# Altium PCB PCB4.PcbDoc (part 6 of 7)
Units mm, origin at the board's own origin, x right, y up, seen from the top; angles counter-clockwise.
Board outline 234.9 x 198.3 mm, 4 copper layers (Top Layer, Signal Layer 2, Mid, Bottom Layer), stack 3.052 mm thick; 410 components, 320 nets, 2032 pads, 297 vias.
Unrouted connection lines stored in the file: 1.
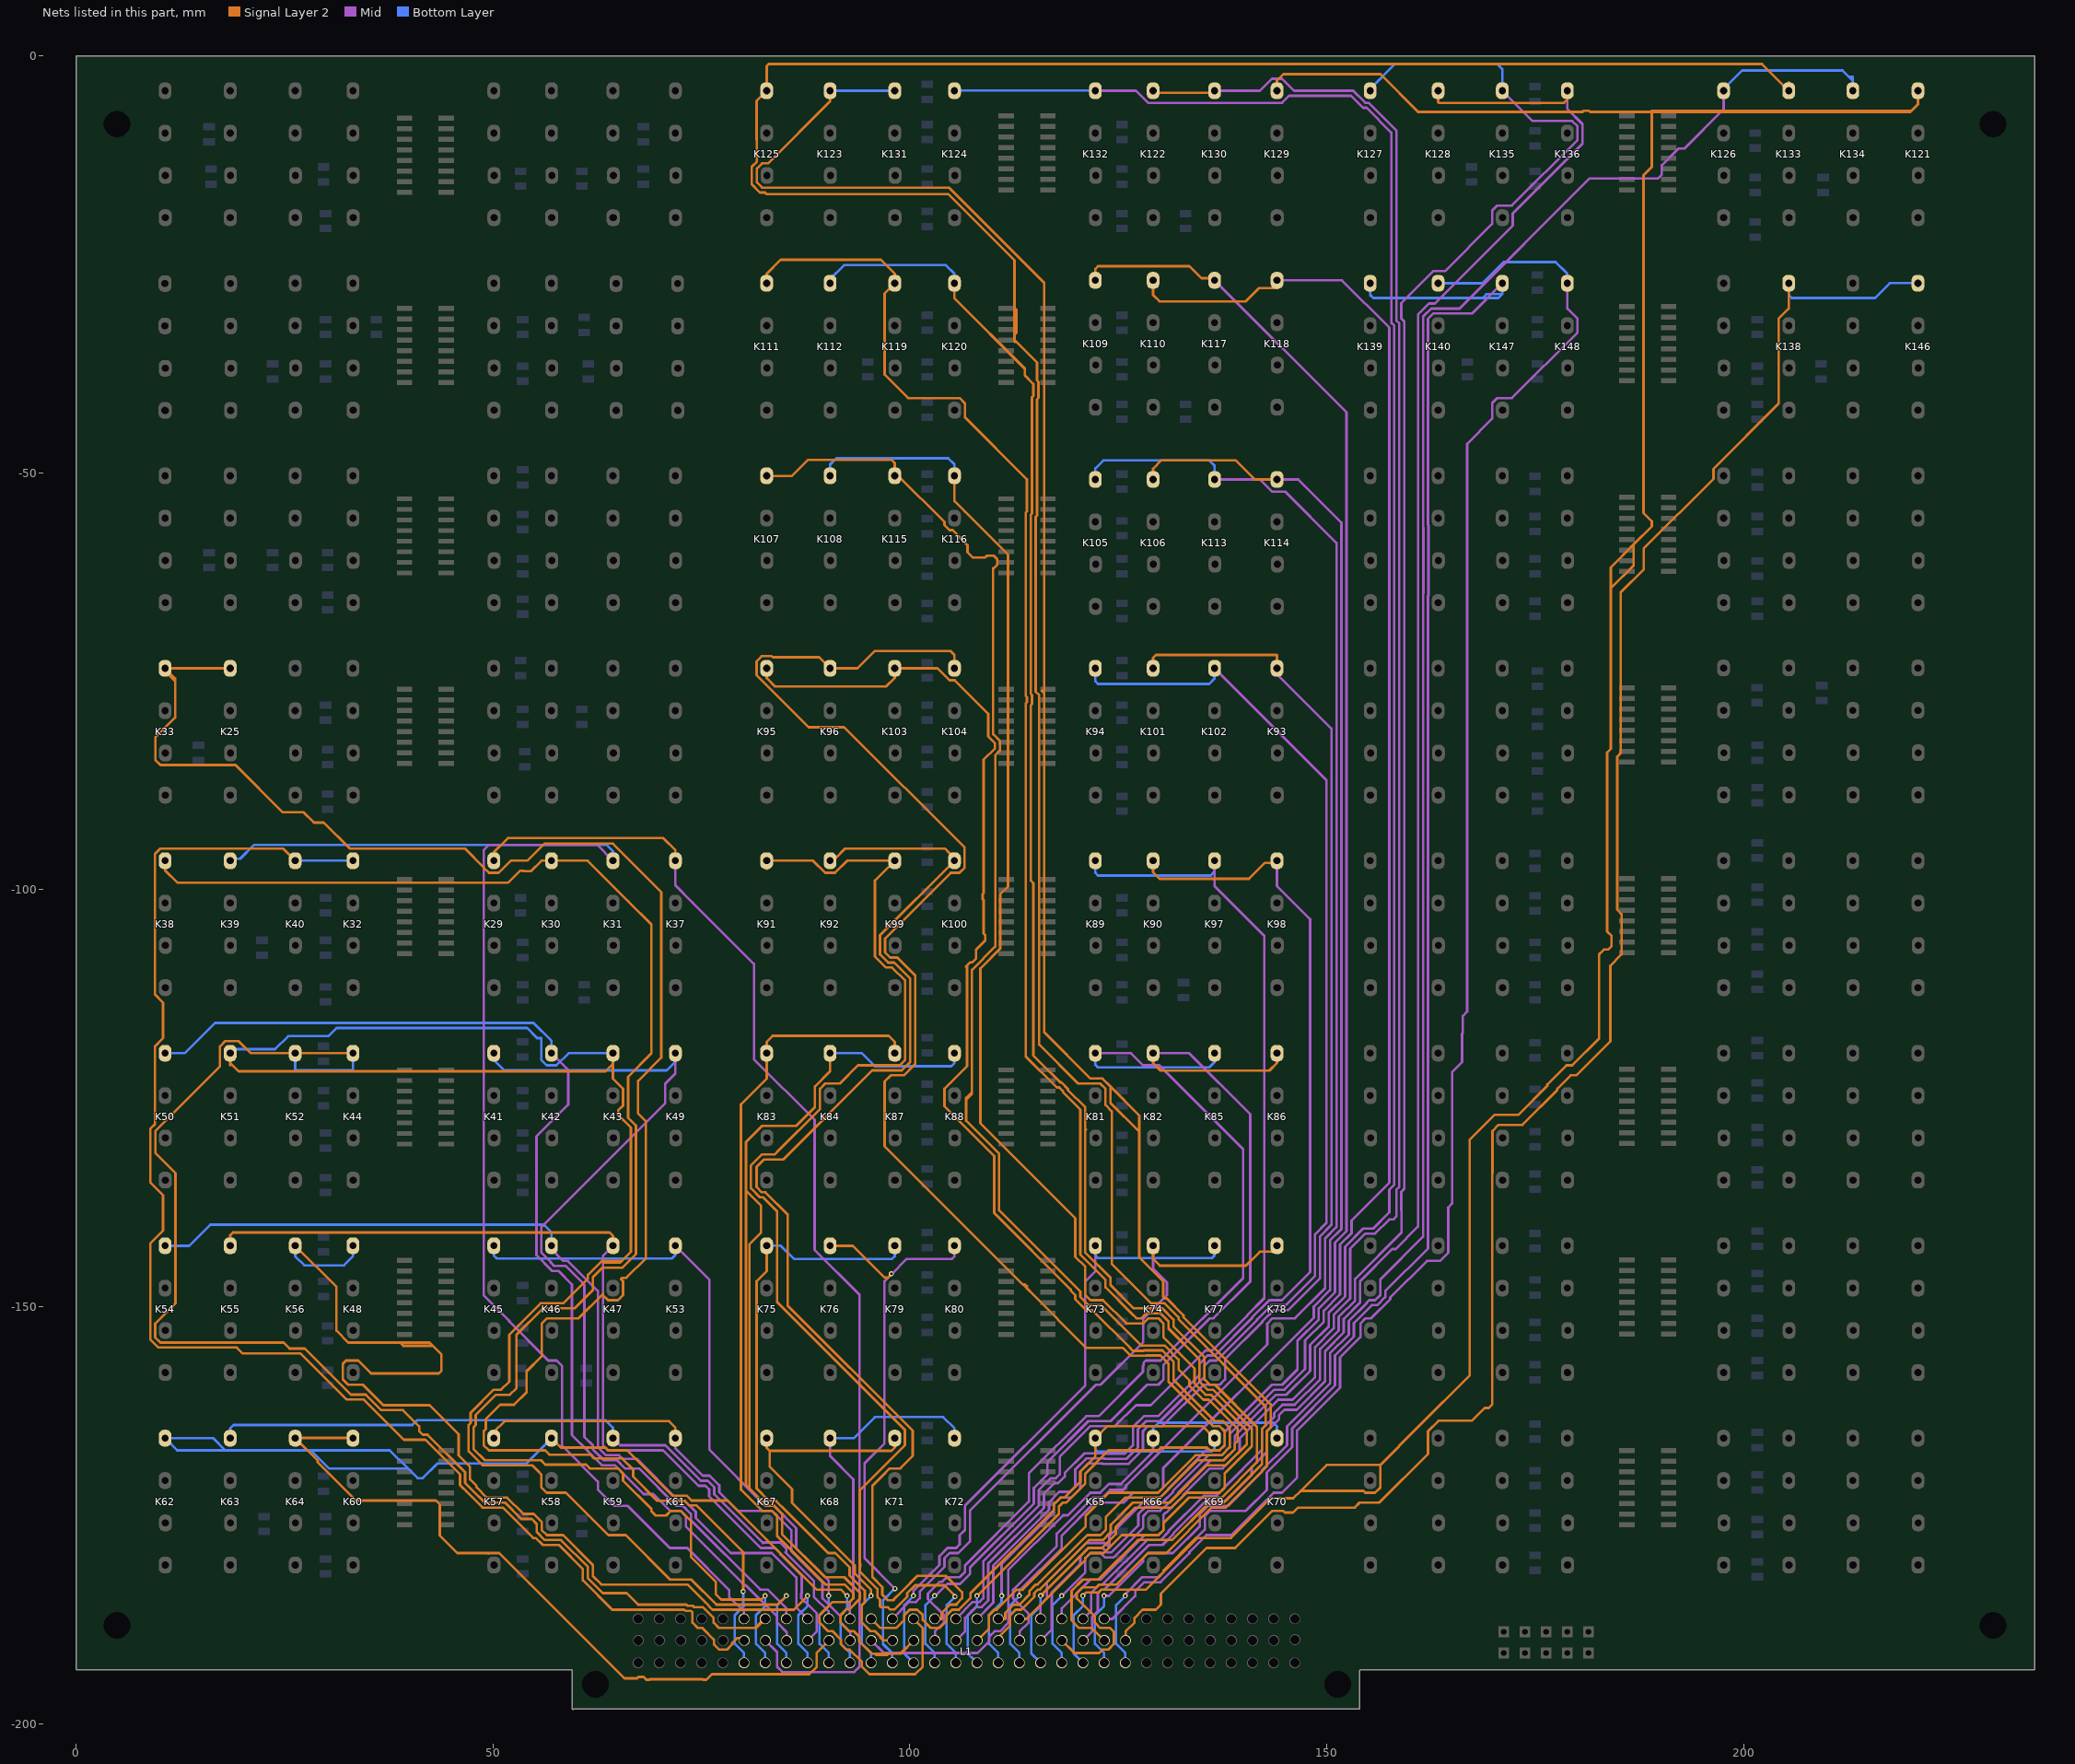
[diagram p8: the nets of this part, all layers, seen from the top]

## Via types
v1: diameter 0.6, hole 0.3, Top Layer to Bottom Layer, 292 vias
v2: diameter 0.7, hole 0.3, Top Layer to Bottom Layer, 5 vias

## Nets (pads, with @x,y where several pads share a name; then routed paths per layer and width w, separated by ;. In a path a pad name is that pad's centre, name@x,y a point inside that pad or via, vN(x,y) a via of type N, cw(c..) or ccw(c..) an arc to the next point about the centre after c; other vN are vias at no path point) (continued)
Y30: K25.7 K33.7 L1.16 | length 233.5
  Signal Layer 2 w0.3: K25.7@18.491,-73.432 18.491,-73.439 K33.7@10.689,-73.439 ; v1(80.008,-184.132) 80.008,-179.6 ; K33.7@10.681,-73.432 10.669,-73.444 10.669,-73.764 11.893,-74.988 ; K33.7@10.681,-73.432 10.681,-73.439 K33.7@10.689,-73.439 ; K33.7@10.681,-73.432 K33.7@10.689,-73.439 ; K33.7@10.689,-73.439 11.893,-74.644 11.893,-74.988 ; 11.893,-74.988 11.893,-79.341 9.509,-81.725 9.509,-84.421 10.13,-85.042 17.94,-85.042 19.133,-85.042 24.793,-90.702 27.303,-90.702 28.532,-91.93 29.716,-91.93 ; 29.716,-91.93 32.844,-95.059 ; 29.716,-91.93 32.844,-95.059 ; 32.844,-95.059 46.647,-95.059 ; 46.647,-95.059 48.887,-97.3 ; 46.647,-95.059 48.887,-97.3 ; 48.887,-97.3 48.887,-97.339 49.508,-97.959 50.69,-97.959 52.147,-96.502 54.138,-96.502 56.181,-94.459 64.386,-94.459 70.194,-100.267 70.194,-120.119 67.407,-122.906 67.407,-126.822 68.34,-127.755 68.34,-144.155 65.98,-146.515 65.497,-146.515 65.351,-146.66 65.607,-146.915 65.607,-148.574 64.986,-149.195 63.803,-149.195 63.183,-148.574 63.183,-148.464 60.271,-151.375 56.469,-151.375 55.849,-151.995 55.849,-155.914 54.03,-157.733 54.03,-160.235 52.529,-161.735 50.849,-161.735 49.134,-163.45 49.134,-164.667 48.887,-164.913 48.887,-166.572 49.508,-167.192 56.25,-167.192 56.772,-167.714 61.661,-167.714 62.119,-168.173 65.483,-168.173 66.807,-169.496 66.807,-170.345 69.714,-173.253 73.008,-173.253 73.566,-173.81 74.414,-173.81 80.008,-179.404 ; 80.008,-179.6 80.106,-179.502 80.008,-179.404 ; 80.008,-179.6 80.008,-179.404
  Bottom Layer w0.3: v1(80.008,-184.132) 80.008,-185.747 ; L1.16@80.106,-192.681 80.106,-191.516 79.005,-190.416 79.005,-186.945 80.008,-185.943 ; 80.008,-185.943 80.106,-185.845 80.008,-185.747 ; 80.008,-185.943 80.008,-185.747
Y32: K32.7 K40.7 L1.17 | length 183
  Signal Layer 2 w0.3: K40.7@26.287,-96.509 24.837,-95.059 10.09,-95.059 9.469,-95.68 9.469,-112.554 10.441,-113.526 10.441,-117.786 9.469,-118.758 9.469,-128.109 8.909,-128.669 8.909,-135.071 10.441,-136.604 10.441,-140.863 8.909,-142.395 8.909,-153.903 9.881,-154.875 19.259,-154.875 19.977,-155.592 26.924,-155.592 32.448,-161.116 34.499,-161.116 39.308,-165.925 41.901,-165.925 46.054,-170.077 46.054,-171.364 46.284,-171.594 46.826,-172.136 ; L1.17@80.136,-189.99 79.846,-189.701 79.294,-189.701 79.004,-189.99 78.696,-190.299 78.696,-190.446 78.051,-191.091 77.14,-191.091 76.496,-190.446 76.496,-189.875 75.121,-188.501 74.57,-188.501 73.925,-187.856 73.925,-186.65 73.716,-186.44 73.081,-186.44 72.941,-186.3 72.102,-186.3 68.245,-186.3 64.302,-186.3 60.783,-182.781 60.783,-181.429 57.906,-178.552 55.972,-178.552 55.127,-177.708 54.834,-177.708 ; 46.826,-172.136 48.762,-174.072 ; 46.826,-172.136 48.762,-174.072 ; 48.762,-174.072 51.199,-174.072 ; 51.199,-174.072 54.834,-177.708 ; 51.199,-174.072 54.834,-177.708
  Bottom Layer w0.3: K40.7@26.287,-96.509 26.287,-96.502 33.208,-96.502 K32.7@33.208,-96.509
Y34: K31.7 K39.7 L1.18 | length 172.7
  Mid w0.3: K31.7@64.395,-96.509 62.488,-94.603 49.528,-94.603 48.887,-95.243 48.887,-137.685 48.887,-148.608 51.951,-151.672 51.951,-151.758 56.623,-156.43 57.647,-156.43 58.272,-157.055 58.272,-166.559 58.233,-166.599 62.583,-170.949 62.583,-171.9 64.535,-173.853 66.147,-173.853 71.202,-178.908 73.303,-178.908 78.316,-183.92 78.316,-184.76 80.106,-186.55 L1.18@80.106,-187.401
  Bottom Layer w0.3: K39.7@18.491,-96.509 18.491,-96.274 19.683,-96.274 21.334,-94.623 63.658,-94.623 64.395,-95.359 K31.7@64.395,-96.509
Y36: K30.7 K38.7 L1.19 | length 197.6
  Signal Layer 2 w0.3: K38.7@10.681,-96.509 10.681,-97.661 12.179,-99.159 51.814,-99.159 53.27,-97.702 53.64,-97.702 53.703,-97.765 54.573,-97.765 55.828,-96.509 K30.7@57.021,-96.509 61.356,-96.509 66.207,-101.36 68.994,-104.147 68.994,-119.622 66.207,-122.409 66.207,-127.319 67.14,-128.252 67.14,-143.658 65.483,-145.315 63.086,-145.315 61.983,-146.418 61.983,-147.967 59.774,-150.175 55.972,-150.175 52.83,-153.317 52.83,-159.738 52.032,-160.535 50.352,-160.535 47.934,-162.953 47.934,-164.17 47.687,-164.416 47.687,-167.069 49.011,-168.392 55.753,-168.392 56.275,-168.914 61.164,-168.914 61.622,-169.373 64.986,-169.373 65.607,-169.993 65.607,-170.842 68.994,-174.229 68.994,-174.481 69.53,-175.018 70.763,-175.018 71.328,-174.453 72.511,-174.453 73.731,-175.673 73.731,-179.036 73.731,-179.975 74.331,-180.575 76.718,-182.961 76.718,-183.822 76.718,-184.443 77.375,-185.1 82.186,-185.1 v1(82.646,-184.64)
  Bottom Layer w0.3: L1.19@82.646,-192.681 82.646,-191.516 81.545,-190.416 81.545,-186.945 82.646,-185.845 v1(82.646,-184.64)
Y38: K29.7 K37.7 L1.20 | length 145.3
  Mid w0.3: K37.7@71.88,-96.509 71.88,-99.474 73.896,-101.491 73.906,-101.491 81.303,-108.887 81.303,-120.302 88.567,-127.567 88.567,-143.162 93.952,-148.547 93.952,-193.149 93.317,-193.784 84.707,-193.784 84.072,-193.149 84.072,-191.386 L1.20@82.676,-189.99
  Signal Layer 2 w0.3: K29.7@50.099,-96.509 50.099,-95.499 51.801,-93.797 70.432,-93.797 71.88,-95.245 K37.7@71.88,-96.509
Y40: K44.7 K52.7 L1.21 | length 160.9
  Signal Layer 2 w0.3: K44.7@33.208,-119.587 K52.7@26.287,-119.587 20.961,-119.587 19.511,-118.137 17.9,-118.137 17.27,-118.767 17.27,-121.157 9.509,-128.918 9.509,-131.554 11.933,-133.978 11.933,-149.571 9.509,-151.995 9.509,-153.654 10.13,-154.275 24.887,-154.275 25.604,-154.992 27.431,-154.992 32.954,-160.516 34.748,-160.516 36.612,-162.38 38.653,-162.38 39.206,-162.38 41.158,-164.333 41.158,-164.885 41.597,-165.325 42.149,-165.325 46.654,-169.828 46.654,-170.925 46.654,-171.115 47.426,-171.887 49.011,-173.472 51.447,-173.472 53.401,-175.426 53.695,-175.426 54.647,-175.426 55.249,-176.028 55.249,-176.98 56.221,-177.952 58.154,-177.952 61.383,-181.181 61.383,-182.532 63.167,-184.316 66.024,-184.316 67.408,-185.7 67.473,-185.7 72.351,-185.7 73.19,-185.7 73.33,-185.84 73.964,-185.84 74.114,-185.991 75.171,-185.991 76.465,-187.285 76.465,-187.856 77.11,-188.501 78.405,-188.501 81.41,-188.501 ; 81.41,-188.501 81.545,-188.501 L1.21@82.646,-187.401 82.455,-187.21 82.145,-187.21 82.145,-187.765 81.41,-188.501
  Bottom Layer w0.3: K52.7@26.287,-119.587 26.287,-121.649 33.208,-121.649 K44.7@33.208,-119.587
Y42: K43.7 K51.7 L1.22 | length 219.1
  Signal Layer 2 w0.3: 18.491,-121.039 18.491,-120.759 ; K51.7@18.491,-119.587 18.491,-120.759 ; K43.7@64.395,-119.587 64.395,-120.853 ; v1(85.186,-184.64) 84.126,-185.7 82.646,-185.7 76.794,-185.7 73.784,-182.69 71.25,-182.69 65.912,-177.352 63.843,-177.352 58.763,-172.272 56.429,-172.272 55.809,-171.652 55.809,-170.109 55.362,-169.662 54.692,-168.992 52.422,-168.992 48.762,-168.992 47.087,-167.317 47.087,-164.168 47.334,-163.921 47.334,-162.704 50.103,-159.935 50.979,-159.935 51.951,-158.963 51.951,-153.347 55.724,-149.575 57.978,-149.575 58.397,-149.575 61.383,-146.59 61.383,-146.17 63.053,-144.5 63.12,-144.5 ; 18.491,-120.759 19.482,-121.75 63.498,-121.75 64.395,-120.853 ; 63.12,-144.5 63.335,-144.715 65.234,-144.715 65.449,-144.5 ; 63.12,-144.5 65.449,-144.5 ; 64.395,-120.853 64.395,-122.626 65.607,-123.838 65.607,-125.869 65.007,-126.469 65.007,-126.968 65.607,-127.568 ; 65.449,-144.5 66.54,-143.409 66.54,-128.501 ; 65.607,-127.568 66.54,-128.501 ; 65.607,-127.568 66.54,-128.501
  Bottom Layer w0.3: K51.7@18.97,-119.108 23.875,-119.108 25.447,-117.537 30.271,-117.537 31.24,-116.569 54.1,-116.569 55.301,-117.77 55.809,-117.77 55.809,-120.416 56.429,-121.037 57.612,-121.037 59.062,-119.587 K43.7@64.395,-119.587 ; L1.22@85.186,-192.681 85.186,-191.516 84.085,-190.416 84.085,-186.945 84.085,-185.741 v1(85.186,-184.64)
Y44: K42.7 K50.7 L1.23 | length 138.3
  Mid w0.3: K42.7@57.021,-119.587 59.018,-121.584 59.018,-125.749 55.209,-129.558 55.209,-143.807 57.097,-145.695 57.86,-145.695 59.472,-147.307 59.472,-165.375 61.383,-167.286 61.383,-167.317 63.058,-168.992 64.614,-168.992 68.07,-172.448 69.249,-172.448 71.253,-174.453 72.511,-174.453 73.131,-175.073 73.131,-176.331 80.183,-183.382 80.318,-183.382 84.085,-187.15 84.085,-187.856 85.216,-188.986 L1.23@85.216,-189.99
  Bottom Layer w0.3: K50.7@10.681,-119.587 10.681,-119.591 13.053,-119.591 16.676,-115.968 54.856,-115.968 57.021,-118.133 K42.7@57.021,-119.587
Y46: K41.7 K49.7 L1.24 | length 115
  Mid w0.3: K49.7@71.879,-119.587 71.879,-122.005 70.667,-123.217 70.667,-125.555 55.809,-140.414 55.809,-143.494 56.994,-144.679 56.994,-144.743 57.345,-145.095 58.73,-145.095 60.958,-147.323 60.958,-165.59 61.983,-166.616 61.983,-167.069 63.306,-168.392 64.862,-168.392 65.842,-169.373 67.54,-169.373 72.02,-173.853 72.759,-173.853 73.731,-174.825 73.731,-175.564 82.058,-183.89 82.956,-183.89 85.186,-186.12 L1.24@85.186,-187.401
  Bottom Layer w0.3: K41.7@50.099,-119.587 K41.7@50.099,-120.38 ; K49.7@71.879,-119.587 71.879,-120.594 70.837,-121.637 51.356,-121.637 K41.7@50.156,-120.437 ; K41.7@50.099,-120.38 K41.7@50.156,-120.437 ; K41.7@50.099,-120.38 50.099,-120.437 K41.7@50.156,-120.437
Y48: K48.7 K56.7 L1.25 | length 138.8
  Signal Layer 2 w0.3: K56.7@26.287,-142.665 31.24,-147.618 31.24,-152.858 32.657,-154.275 38.851,-154.275 ; v1(87.726,-184.64) 86.066,-186.3 84.586,-186.3 79.65,-186.3 78.021,-186.3 76.33,-186.3 75.42,-185.391 73.32,-183.29 70.153,-183.29 69.034,-183.29 62.989,-183.29 61.983,-182.284 61.983,-180.932 58.403,-177.352 56.469,-177.352 55.849,-176.732 55.849,-175.78 54.895,-174.826 53.65,-174.826 51.696,-172.872 49.449,-172.872 49.259,-172.872 48.026,-171.639 48.026,-171.449 ; 38.851,-154.275 39.245,-154.668 42.79,-154.668 ; 38.851,-154.275 42.397,-154.275 42.79,-154.668 ; 42.79,-154.668 43.806,-155.684 43.806,-157.688 43.524,-157.97 35.375,-157.97 33.834,-156.43 32.383,-156.43 31.996,-156.816 31.996,-156.916 31.996,-158.709 32.622,-159.335 34.415,-159.335 36.861,-161.78 42.399,-161.78 45.887,-165.269 45.887,-167.814 47.254,-169.181 47.254,-170.677 ; 47.254,-170.677 48.026,-171.449 ; 47.254,-170.677 48.026,-171.449
  Bottom Layer w0.3: K56.7@26.287,-142.665 26.287,-143.937 27.366,-145.017 32.129,-145.017 33.208,-143.937 K48.7@33.208,-142.665 ; L1.25@87.726,-192.681 87.726,-191.516 86.625,-190.416 86.625,-186.945 87.726,-185.845 v1(87.726,-184.64)
Y50: K47.7 K55.7 L1.26 | length 113
  Mid w0.3: K47.7@64.395,-142.665 63.183,-143.877 63.183,-166.572 63.803,-167.192 70.409,-167.192 74.661,-171.444 75.492,-171.444 75.932,-171.884 75.932,-172.715 82.124,-178.908 83.818,-178.908 84.479,-179.569 84.479,-179.695 87.019,-182.235 87.019,-184.286 86.976,-184.33 86.976,-184.951 87.415,-185.391 87.472,-185.391 88.826,-186.744 88.826,-188.92 L1.26@87.756,-189.99
  Signal Layer 2 w0.3: K55.7@18.491,-142.665 18.491,-141.397 18.809,-141.079 63.98,-141.079 64.395,-141.494 K47.7@64.395,-142.665
Y52: K46.7 K54.7 L1.27 | length 112.4
  Mid w0.3: K46.7@57.021,-142.665 57.021,-143.098 58.418,-144.495 58.978,-144.495 62.583,-148.099 62.583,-166.82 63.555,-167.792 65.111,-167.792 65.541,-168.222 67.238,-168.222 72.268,-173.253 73.008,-173.253 74.331,-174.576 74.331,-175.316 78.523,-179.508 83.443,-179.508 86.376,-182.44 86.376,-186.051 L1.27@87.726,-187.401
  Bottom Layer w0.3: K54.7@10.681,-142.665 10.681,-142.68 13.561,-142.68 16.101,-140.14 56.081,-140.14 57.021,-141.079 K46.7@57.021,-142.665
Y54: K45.7 K53.7 L1.28 | length 83.5
  Mid w0.3: K53.7@71.88,-142.665 75.944,-146.729 75.944,-167.114 82.681,-173.853 83.697,-173.853 86.368,-176.523 86.368,-178.945 90.266,-182.843 v1(90.266,-184.64)
  Bottom Layer w0.3: K45.7@50.099,-142.665 50.099,-143.823 50.48,-144.204 71.435,-144.204 71.88,-143.759 K53.7@71.88,-142.665 ; L1.28@90.266,-192.681 90.266,-191.516 89.165,-190.416 89.165,-186.945 90.266,-185.845 v1(90.266,-184.64)
Y56: K60.7 K64.7 L1.29 | length 88.5
  Signal Layer 2 w0.3: K60.7@33.208,-165.742 33.208,-165.717 26.287,-165.717 K64.7@26.287,-165.742 28.983,-168.439 28.983,-168.638 33.567,-173.222 43.183,-173.222 43.623,-173.662 43.623,-177.413 45.718,-179.508 49.508,-179.508 ; 49.455,-179.56 49.508,-179.508 ; L1.29@90.296,-189.99 88.826,-191.46 88.826,-193.136 87.923,-194.039 76.254,-194.039 75.592,-194.701 75.219,-194.701 75.157,-194.639 68.826,-194.639 68.764,-194.701 68.391,-194.701 68.071,-194.381 67.452,-194.381 67.286,-194.547 65.764,-194.547 54.37,-183.152 50.725,-179.508 49.508,-179.508
Y58: K59.7 K63.7 L1.30 | length 86.5
  Mid w0.3: K59.7@64.395,-165.742 65.245,-166.592 70.657,-166.592 74.909,-170.844 75.741,-170.844 76.532,-171.635 76.532,-172.467 82.372,-178.308 82.399,-178.308 82.468,-178.239 84.453,-178.239 85.168,-178.954 85.168,-179.358 85.079,-179.446 88.476,-182.843 88.476,-184.76 90.266,-186.55 L1.30@90.266,-187.401
  Bottom Layer w0.3: K63.7@18.491,-165.742 18.491,-164.574 18.897,-164.168 40.333,-164.168 40.917,-163.584 63.498,-163.584 64.395,-164.481 K59.7@64.395,-165.742
Y60: K58.7 K62.7 L1.31 | length 123.7
  Signal Layer 2 w0.3: K58.7@57.021,-165.742 58.16,-166.882 63.492,-166.882 63.803,-167.192 64.986,-167.192 66.115,-167.192 71.575,-172.653 73.256,-172.653 73.814,-173.21 78.124,-173.21 88.804,-183.89 89.955,-183.89 90.576,-183.89 91.704,-183.89 v1(92.454,-184.64)
  Bottom Layer w0.3: K58.7@57.021,-165.742 53.991,-168.773 43.342,-168.773 41.583,-170.532 40.962,-170.532 39.803,-169.373 ; v1(92.454,-184.64) 92.454,-185.493 ; L1.31@92.806,-192.681 92.806,-191.516 91.705,-190.416 91.705,-186.945 92.454,-186.197 ; 17.9,-167.192 16.45,-165.742 K62.7@10.681,-165.742 12.131,-167.192 17.9,-167.192 ; 17.9,-167.192 28.148,-167.192 ; 28.148,-167.192 30.328,-169.373 39.803,-169.373 ; 28.148,-167.192 37.623,-167.192 39.803,-169.373 ; 92.454,-186.197 92.454,-185.493 ; 92.454,-186.197 92.806,-185.845 92.454,-185.493
Y62: K57.7 K61.7 L1.32 | length 60.5
  Mid w0.3: K61.7@71.88,-165.742 71.88,-166.966 75.158,-170.244 75.989,-170.244 77.132,-171.387 77.132,-172.218 79.366,-174.453 83.448,-174.453 85.768,-176.772 85.768,-179.286 89.516,-183.034 89.516,-184.951 91.705,-187.141 91.705,-187.856 92.836,-188.986 L1.32@92.836,-189.99
  Signal Layer 2 w0.3: K57.7@50.099,-165.742 50.099,-164.997 51.385,-163.711 71.118,-163.711 71.88,-164.473 K61.7@71.88,-165.742
Y64: K68.7 K72.7 L1.33 | length 40.7
  Mid w0.3: K68.7@90.422,-165.742 90.422,-167.877 93.204,-170.659 93.204,-184.951 92.806,-185.349 L1.33@92.806,-187.401
  Bottom Layer w0.3: K68.7@90.422,-165.742 93.241,-165.743 95.781,-163.203 103.972,-163.203 105.344,-164.574 K72.7@105.344,-165.742
Y66: K67.7 K71.7 L1.34 | length 49.3
  Signal Layer 2 w0.3: K67.7@82.817,-165.742 82.817,-166.901 83.183,-167.267 ; v1(95.346,-184.64) 95.346,-183.926 93.378,-181.958 93.378,-180.989 91.296,-178.908 85.869,-173.48 85.869,-171.833 83.183,-169.147 83.183,-167.267 ; K71.7@98.183,-165.742 98.183,-166.871 97.788,-167.267 83.183,-167.267
  Bottom Layer w0.3: L1.34@95.346,-192.681 95.346,-191.516 94.245,-190.416 94.245,-185.741 v1(95.346,-184.64)
Y68: K66.7 K70.7 L1.35 | length 68
  Mid w0.3: L1.35@95.376,-189.99 96.884,-191.498 108.123,-191.498 109.516,-190.106 109.516,-189.535 110.16,-188.89 110.81,-188.89 111.776,-187.925 111.776,-181.575 118.374,-174.977 118.926,-174.977 121.63,-172.272 122.826,-172.272 123.873,-171.226 125.303,-171.226 129.157,-167.372 K66.7@129.157,-165.742
  Bottom Layer w0.3: K66.7@129.157,-165.742 129.157,-164.574 129.842,-163.889 143.584,-163.889 144.016,-164.32 K70.7@144.016,-165.742
Y70: K65.7 K69.7 L1.36 | length 75.7
  Signal Layer 2 w0.3: L1.36@95.346,-187.401 96.446,-188.501 98.341,-188.501 99.325,-187.516 99.325,-186.945 99.97,-186.3 100.881,-186.3 101.526,-186.945 101.526,-187.516 102.51,-188.501 103.554,-188.501 104.405,-187.649 104.405,-186.945 105.05,-186.3 105.866,-186.3 107.278,-184.889 107.278,-184.294 117.266,-174.307 117.266,-173.667 118.056,-172.876 118.486,-172.876 120.423,-170.94 120.423,-169.745 122.235,-167.933 K65.7@122.235,-165.742 123.685,-164.293 128.565,-164.293 129.748,-164.293 135.081,-164.293 K69.7@136.531,-165.742 135.919,-165.742 K69.7@135.919,-165.657
  Bottom Layer w0.3: K65.7@122.235,-165.742 122.235,-167.114 122.456,-167.335 136.205,-167.335 136.531,-167.01 K69.7@136.531,-165.742
Y72: K76.7 K80.7 L1.37 | length 74.5
  Mid w0.3: v1(97.788,-146.033) v1@97.788,-146.099 ; v1(98.194,-183.777) 94.562,-180.145 94.562,-168.765 96.949,-166.378 96.949,-146.937 v1@97.788,-146.099 ; K80.7@105.344,-142.665 105.344,-143.937 105.027,-144.254 99.632,-144.254 v1@97.788,-146.099
  Signal Layer 2 w0.3: K76.7@90.422,-142.665 90.422,-142.68 93.165,-142.68 96.971,-146.486 97.334,-146.486 v1(97.788,-146.033)
  Bottom Layer w0.3: 96.785,-186.945 96.785,-190.416 97.886,-191.516 97.886,-191.571 ; L1.37@97.886,-192.681 97.886,-191.571 ; v1(98.194,-183.777) 96.772,-185.199 96.772,-190.457 97.886,-191.571
Y74: K75.7 K79.7 L1.38 | length 77
  Signal Layer 2 w0.3: K75.7@82.817,-142.665 82.817,-145.703 81.605,-146.915 81.605,-171.761 ; L1.38@97.916,-189.99 96.931,-189.99 ; 81.605,-171.761 83.097,-173.253 ; 81.605,-171.761 83.097,-173.253 ; 83.097,-173.253 83.945,-173.253 85.269,-174.576 90.2,-179.508 91.048,-179.508 92.778,-181.237 92.778,-182.207 94.596,-184.025 94.596,-185.396 94.245,-185.746 94.245,-187.856 95.28,-188.89 95.831,-188.89 96.476,-189.535 ; 96.476,-189.535 96.476,-189.679 96.788,-189.99 96.931,-189.99 ; 96.476,-189.535 96.931,-189.99
  Bottom Layer w0.3: K75.7@82.817,-142.665 82.817,-142.654 84.503,-142.654 86.104,-144.254 97.866,-144.254 98.183,-143.937 K79.7@98.183,-142.665
Y76: K74.7 K78.7 L1.39 | length 78.7
  Mid w0.3: L1.39@97.886,-187.401 99.896,-185.391 100.736,-185.391 101.176,-184.951 101.176,-184.133 104.132,-181.176 104.132,-180.128 104.753,-179.507 105.801,-179.507 107.196,-178.113 107.196,-174.457 122.319,-159.335 122.866,-159.335 127.985,-154.217 127.985,-151.395 130.808,-148.572 130.808,-147.048 129.157,-145.397 K74.7@129.157,-142.665
  Signal Layer 2 w0.3: K74.7@129.157,-142.665 129.157,-144.254 129.969,-145.067 140.282,-145.067 141.958,-143.391 144.016,-143.391 K78.7@144.016,-142.665
Y78: K73.7 K77.7 L1.40 | length 77.5
  Mid w0.3: v1(100.426,-184.64) 100.426,-184.035 103.532,-180.928 103.532,-179.88 104.504,-178.907 105.553,-178.907 105.975,-178.485 105.975,-177.352 106.596,-176.732 106.596,-173.845 121.023,-159.418 121.023,-146.915 122.235,-145.703 K73.7@122.235,-142.665
  Bottom Layer w0.3: L1.40@100.426,-192.681 99.325,-191.58 99.325,-185.741 v1(100.426,-184.64) ; K73.7@122.235,-142.665 122.235,-143.835 122.545,-144.145 136.205,-144.145 136.531,-143.819 K77.7@136.531,-142.665
Y80: K84.7 K88.7 L1.41 | length 152
  Signal Layer 2 w0.3: K84.7@90.422,-119.587 90.422,-121.777 88.61,-123.589 88.61,-126.036 86.348,-128.297 83.902,-128.297 82.266,-128.297 80.332,-130.231 80.332,-136.055 ; L1.41@100.456,-189.99 98.866,-191.58 97.43,-191.58 ; 80.332,-136.055 82.144,-137.868 82.144,-141.102 80.77,-142.476 80.77,-171.774 ; 80.332,-136.055 80.332,-171.336 80.77,-171.774 ; 80.77,-171.774 82.848,-173.853 83.697,-173.853 84.669,-174.825 84.669,-177.246 89.835,-182.413 92.135,-182.413 93.996,-184.273 93.996,-185.008 92.747,-186.256 92.394,-186.256 91.705,-186.945 91.705,-187.888 ; 91.705,-187.888 92.708,-188.89 ; 91.705,-187.888 92.708,-188.89 ; 92.708,-188.89 93.291,-188.89 93.936,-189.535 93.936,-190.106 95.41,-191.58 95.801,-191.58 ; 95.801,-191.58 95.973,-191.752 97.258,-191.752 97.43,-191.58 ; 95.801,-191.58 97.43,-191.58
  Bottom Layer w0.3: K84.7@90.422,-119.587 90.422,-119.566 94.206,-119.566 95.781,-121.14 104.963,-121.14 105.344,-120.759 K88.7@105.344,-119.587
Y82: K83.7 K87.7 L1.42 | length 120.9
  Signal Layer 2 w0.3: K87.7@98.183,-119.587 98.183,-118.219 97.472,-117.508 83.528,-117.508 82.817,-118.219 K83.7@82.817,-119.587 82.817,-122.626 79.732,-125.711 79.732,-171.919 82.265,-174.453 83.448,-174.453 84.069,-175.073 84.069,-177.495 89.865,-183.29 92.164,-183.29 93.204,-184.33 93.204,-184.951 92.764,-185.391 92.411,-185.391 90.72,-185.391 89.81,-186.3 89.165,-186.945 89.165,-187.856 90.2,-188.89 90.751,-188.89 91.736,-189.875 91.736,-190.446 92.38,-191.091 92.771,-191.091 94.245,-192.565 94.245,-193.136 95.148,-194.038 100.623,-194.038 101.526,-193.136 101.526,-190.476 101.556,-190.446 101.556,-188.531 L1.42@100.426,-187.401
Y84: K82.7 K86.7 L1.43 | length 118.6
  Mid w0.3: v1(102.966,-184.64) 103.041,-184.64 104.473,-183.208 106.028,-183.208 107.196,-182.04 107.196,-181.258 114.866,-173.589 114.866,-171.713 116.469,-170.11 116.469,-168.619 121.395,-163.693 124.078,-163.693 128.435,-159.335 129.788,-159.335 130.409,-158.714 130.409,-156.946 135.979,-151.375 136.396,-151.375 140.806,-146.965 140.806,-126.901 133.492,-119.587 K82.7@129.157,-119.587
  Signal Layer 2 w0.3: K82.7@129.157,-119.587 129.157,-120.759 130.071,-121.674 143.101,-121.674 144.016,-120.759 K86.7@144.016,-119.587
  Bottom Layer w0.3: L1.43@102.966,-192.681 102.966,-191.516 101.865,-190.416 101.865,-186.945 101.865,-185.741 v1(102.966,-184.64)
Y86: K81.7 K85.7 L1.44 | length 118.4
  Mid w0.3: L1.44@102.996,-189.99 102.996,-188.926 104.066,-187.856 104.066,-186.945 102.159,-185.038 102.159,-184.386 103.591,-182.954 103.878,-182.954 104.42,-182.413 105.975,-182.413 106.596,-181.792 106.596,-181.01 114.266,-173.34 114.266,-169.974 121.147,-163.093 122.638,-163.093 127.945,-157.785 127.945,-157.05 128.014,-156.981 128.014,-156.701 128.284,-156.43 130.062,-156.43 139.952,-146.54 139.952,-131.087 129.902,-121.037 127.945,-121.037 126.495,-119.587 K81.7@122.235,-119.587
  Bottom Layer w0.3: K81.7@122.235,-119.587 122.235,-120.975 122.545,-121.285 135.888,-121.285 136.531,-120.642 K85.7@136.531,-119.587
Y88: K92.7 K100.7 L1.45 | length 150.1
  Signal Layer 2 w0.3: K92.7@90.422,-96.509 90.422,-96.528 91.034,-96.528 91.034,-96.261 92.24,-95.055 104.174,-95.055 104.779,-95.659 105.344,-95.659 K100.7@105.344,-96.509 96.411,-105.442 96.411,-107.747 97.383,-108.719 98.103,-108.719 100.035,-110.652 100.035,-120.625 99.023,-121.637 95.493,-121.637 85.342,-131.788 84.801,-132.328 82.491,-132.328 81.605,-133.214 81.605,-135.631 82.231,-136.257 82.655,-136.257 85.342,-138.944 85.342,-149.842 100.328,-164.828 100.328,-167.876 98.832,-169.373 97.592,-169.373 96.696,-170.269 95.502,-171.463 95.502,-182.385 96.696,-183.579 96.696,-184.511 97.136,-184.951 97.358,-185.173 97.984,-185.173 98.257,-184.9 98.803,-184.354 99.076,-184.081 100.916,-182.241 104.278,-182.241 106.256,-184.219 106.256,-184.951 105.618,-185.589 105.618,-185.7 104.801,-185.7 103.805,-186.696 103.805,-187.401 L1.45@102.966,-187.401
Y90: K91.7 K99.7 L1.46 | length 161
  Signal Layer 2 w0.3: K91.7@82.817,-97.493 K91.7@82.817,-96.509 88.38,-96.509 89.83,-97.959 91.013,-97.959 92.463,-96.509 K99.7@98.183,-96.509 95.811,-98.881 95.811,-107.996 97.135,-109.319 97.854,-109.319 99.435,-110.9 99.435,-120.376 98.774,-121.037 93.782,-121.037 91.602,-123.217 89.83,-123.217 89.21,-123.838 89.21,-126.284 ; 84.072,-131.423 89.21,-126.284 ; v1(105.408,-184.738) v1@105.408,-184.64 ; v1@105.506,-184.64 v1@105.408,-184.64 ; 89.21,-126.284 83.766,-131.728 82.242,-131.728 80.932,-133.039 80.932,-135.806 81.982,-136.857 82.407,-136.857 84.072,-138.522 84.072,-149.421 99.395,-164.745 99.395,-166.572 93.978,-171.989 93.978,-180.74 94.04,-180.802 94.04,-181.175 93.978,-181.237 93.978,-181.71 96.096,-183.828 96.096,-184.76 96.418,-185.082 96.418,-185.891 96.517,-185.991 97.326,-185.991 97.629,-186.293 98.142,-186.293 99.676,-184.76 99.676,-184.33 100.635,-183.37 104.138,-183.37 v1@105.408,-184.64
  Bottom Layer w0.3: v1(105.408,-184.738) 104.405,-185.741 104.405,-186.945 104.405,-190.416 105.506,-191.516 L1.46@105.506,-192.681
Y92: K90.7 K98.7 L1.47 | length 136.3
  Mid w0.3: L1.47@105.536,-189.99 106.606,-188.92 106.606,-187.285 107.9,-185.991 108.605,-185.991 109.396,-185.2 109.396,-180.756 116.066,-174.086 116.066,-172.405 117.339,-171.132 117.778,-171.132 118.568,-170.341 118.568,-169.902 120.898,-167.573 123.572,-167.573 123.622,-167.622 125.728,-167.622 126.745,-166.605 126.745,-164.416 128.068,-163.093 129.765,-163.093 134.719,-158.139 134.719,-156.802 135.691,-155.83 136.539,-155.83 141.044,-151.326 141.044,-151.25 143.099,-149.195 144.607,-149.195 147.98,-145.822 147.98,-103.512 144.015,-99.548 K98.7@144.015,-96.509
  Signal Layer 2 w0.3: K90.7@129.157,-96.509 129.157,-97.899 129.944,-98.687 140.663,-98.687 142.593,-96.756 144.015,-96.756 K98.7@144.015,-96.509
Y94: K89.7 K97.7 L1.48 | length 130.2
  Mid w0.3: L1.48@105.506,-187.401 107.516,-185.391 108.356,-185.391 108.796,-184.951 108.796,-180.508 115.466,-173.838 115.466,-171.974 116.908,-170.532 117.529,-170.532 117.968,-170.092 117.968,-167.968 121.644,-164.293 124.597,-164.293 127.109,-161.78 128.892,-161.78 135.442,-155.23 136.291,-155.23 140.444,-151.077 140.444,-151.001 142.492,-148.953 142.492,-105.509 136.531,-99.548 K97.7@136.531,-96.509
  Bottom Layer w0.3: K89.7@122.235,-96.509 122.235,-97.963 122.553,-98.28 136.073,-98.28 136.531,-97.823 K97.7@136.531,-96.509
Y96: K96.7 K104.7 L1.49 | length 213.9
  Signal Layer 2 w0.3: K104.7@105.344,-73.432 105.344,-71.864 104.836,-71.356 95.781,-71.356 93.698,-73.439 90.422,-73.439 K96.7@90.422,-73.432 89.108,-72.118 83.545,-72.118 83.408,-71.982 82.226,-71.982 81.605,-72.602 81.605,-74.261 87.845,-80.501 92.113,-80.501 106.556,-94.943 106.556,-97.339 105.935,-97.959 104.892,-97.959 97.011,-105.84 97.011,-107.499 97.632,-108.119 98.48,-108.119 100.635,-110.274 100.635,-120.873 99.271,-122.237 97.707,-122.237 96.971,-122.973 96.971,-130.738 113.548,-147.314 113.592,-147.314 ; v1(108.046,-184.64) 117.866,-174.821 117.866,-173.916 118.305,-173.476 118.735,-173.476 121.023,-171.188 121.023,-169.993 123.824,-167.192 129.748,-167.192 130.08,-166.86 135.607,-166.86 135.939,-167.192 137.122,-167.192 137.743,-166.572 137.743,-164.913 137.122,-164.293 136.325,-164.293 131.009,-158.976 131.009,-156.807 130.031,-155.83 128.317,-155.83 128.278,-155.868 126.5,-155.868 125.554,-154.922 121.156,-154.922 114.286,-148.053 ; 113.592,-147.314 114.032,-147.754 ; 113.592,-147.314 113.814,-147.314 114.032,-147.532 114.032,-147.754 ; 114.032,-147.754 114.286,-148.008 114.286,-148.053 ; 114.032,-147.754 114.032,-147.799 114.286,-148.053
  Bottom Layer w0.3: L1.49@108.046,-192.681 106.945,-191.58 106.945,-190.416 106.945,-186.945 108.046,-185.845 v1(108.046,-184.64)
Y98: K95.7 K103.7 L1.50 | length 182.6
  Signal Layer 2 w0.3: K95.7@82.817,-73.432 82.817,-74.623 83.818,-75.624 97.153,-75.624 98.183,-74.593 K103.7@98.183,-73.432 103.303,-73.432 104.753,-74.882 105.377,-74.882 109.38,-78.884 109.38,-81.608 110.196,-82.425 110.196,-83.046 108.846,-84.396 108.846,-100.385 108.722,-100.51 108.722,-101.131 108.846,-101.256 108.846,-105.256 109.028,-105.437 109.028,-106.059 107.936,-107.151 107.936,-108.243 107.496,-108.683 107.223,-108.683 106.84,-109.066 ; L1.50@108.076,-189.99 109.485,-188.581 109.485,-187.929 109.485,-186.945 110.13,-186.3 110.405,-186.3 112.815,-183.89 113.436,-183.89 ; 106.84,-109.339 106.703,-109.202 106.84,-109.066 ; 106.84,-109.339 106.84,-121.13 104.132,-123.838 104.132,-125.942 110.095,-131.904 110.095,-138.737 119.286,-147.928 119.286,-148.059 119.823,-148.597 119.823,-149.071 121.147,-150.395 121.886,-150.395 126.398,-154.906 126.398,-154.917 126.749,-155.268 128.029,-155.268 128.068,-155.23 130.28,-155.23 131.609,-156.558 131.609,-158.727 136.574,-163.693 137.545,-163.693 138.343,-164.49 138.343,-166.82 137.37,-167.792 134.228,-167.792 129.748,-172.272 123.864,-172.272 121.063,-175.073 121.063,-176.351 113.524,-183.89 ; 106.84,-109.339 106.84,-109.066 ; 113.436,-183.89 113.48,-183.934 113.524,-183.89 ; 113.436,-183.89 113.524,-183.89
Y100: K94.7 K102.7 L1.51 | length 160.5
  Mid w0.3: L1.51@108.046,-187.401 109.996,-185.451 109.996,-181.005 116.666,-174.335 116.666,-173.419 117.902,-172.183 119.18,-172.183 119.823,-171.54 119.823,-169.496 121.147,-168.173 123.323,-168.173 123.373,-168.222 125.976,-168.222 127.345,-166.854 127.345,-164.665 128.317,-163.693 130.014,-163.693 135.319,-158.388 135.319,-157.05 135.939,-156.43 136.788,-156.43 141.644,-151.574 141.644,-151.498 143.347,-149.795 145.079,-149.795 148.58,-146.295 148.58,-141.296 149.95,-139.926 149.95,-86.851 K102.7@136.531,-73.432
  Bottom Layer w0.3: K94.7@122.235,-73.432 122.235,-75.001 122.553,-75.319 135.888,-75.319 136.531,-74.676 K102.7@136.531,-73.432
Y102: K93.7 K101.7 L1.52 | length 164
  Mid w0.3: v1(110.996,-184.64) 110.996,-180.853 117.266,-174.583 117.266,-173.667 118.056,-172.876 119.335,-172.876 120.423,-171.788 120.423,-169.745 121.395,-168.773 123.075,-168.773 123.125,-168.822 126.225,-168.822 127.945,-167.103 127.945,-164.913 128.565,-164.293 130.262,-164.293 135.22,-159.335 137.162,-159.335 137.783,-158.714 137.783,-156.283 142.244,-151.823 142.244,-151.747 143.596,-150.395 145.328,-150.395 149.18,-146.543 149.18,-141.544 150.55,-140.174 150.55,-80.684 144.016,-74.15 K93.7@144.016,-73.432
  Signal Layer 2 w0.3: K101.7@129.157,-73.432 129.157,-72.182 129.499,-71.839 143.99,-71.839 144.016,-71.864 K93.7@144.016,-73.432
  Bottom Layer w0.3: L1.52@110.586,-192.681 110.586,-191.516 109.485,-190.416 109.485,-186.945 110.996,-185.435 v1(110.996,-184.64)
Y104: K108.7 K116.7 L1.53 | length 197.2
  Signal Layer 2 w0.3: K116.7@105.344,-50.354 105.344,-53.393 106.556,-54.605 111.758,-59.806 111.758,-60.811 111.758,-99.595 110.834,-100.519 110.834,-107.042 108.456,-109.42 108.456,-127.998 119.823,-139.366 119.823,-143.991 121.023,-145.191 121.023,-148.574 121.644,-149.195 123.156,-149.195 125.936,-151.975 128.005,-151.975 128.605,-151.375 129.788,-151.375 130.409,-151.995 130.409,-153.661 134.119,-157.371 134.119,-159.206 135.447,-160.535 136.085,-160.535 140.404,-164.853 140.404,-166.456 137.867,-168.992 135.62,-168.992 131.14,-173.472 126.746,-173.472 124.087,-176.132 124.087,-176.98 123.115,-177.952 121.502,-177.952 115.564,-183.89 115.355,-183.89 114.916,-184.33 114.916,-184.76 113.375,-186.3 112.67,-186.3 112.025,-186.945 112.025,-188.193 110.616,-189.603 L1.53@110.616,-189.99
  Bottom Layer w0.3: K108.7@90.422,-50.354 90.422,-49.004 91.158,-48.268 104.607,-48.268 105.344,-49.004 K116.7@105.344,-50.354
Y106: K107.7 K115.7 L1.54 | length 205.4
  Signal Layer 2 w0.3: K107.7@82.817,-50.354 82.817,-50.376 85.85,-50.376 87.78,-48.446 97.788,-48.446 98.183,-48.841 K115.7@98.183,-50.354 98.584,-50.354 104.132,-55.902 104.132,-56.263 104.753,-56.884 105.114,-56.884 ; L1.54@110.586,-187.401 111.425,-187.401 111.425,-186.696 112.421,-185.7 113.126,-185.7 114.316,-184.511 114.316,-184.081 115.106,-183.29 115.315,-183.29 121.253,-177.352 122.866,-177.352 123.487,-176.732 123.487,-175.197 125.812,-172.872 129.996,-172.872 134.476,-168.392 137.619,-168.392 138.943,-167.069 138.943,-166.45 139.294,-166.098 139.294,-164.592 135.836,-161.135 135.199,-161.135 133.519,-159.455 133.519,-158.817 132.209,-157.507 132.209,-156.31 130.528,-154.63 127.82,-154.63 127.781,-154.668 122.907,-149.795 121.395,-149.795 120.423,-148.823 120.423,-148.162 110.695,-138.433 110.695,-131.656 106.727,-127.689 ; 105.114,-56.884 106.909,-58.679 ; 105.114,-56.884 106.909,-58.679 ; 106.727,-127.689 106.727,-125.186 107.44,-124.474 107.44,-124.239 ; 106.727,-127.689 106.715,-127.676 106.715,-124.964 107.44,-124.239 ; 106.909,-58.679 106.909,-59.534 107.544,-60.169 109.02,-60.169 109.25,-59.938 110.036,-59.938 110.476,-60.378 110.476,-60.999 110.036,-61.439 109.992,-61.439 109.98,-61.45 109.98,-81.36 110.476,-81.856 110.796,-82.176 110.796,-83.295 110.234,-83.858 110.234,-106.794 107.44,-109.588 107.44,-124.239
Y108: K106.7 K114.7 L1.55 | length 184.8
  Mid w0.3: v1(113.126,-184.64) 113.126,-184.018 118.2,-178.944 118.2,-177.436 122.164,-173.472 125.602,-173.472 126.802,-172.272 129.748,-172.272 130.369,-171.652 130.369,-169.332 148.42,-151.28 148.42,-149.958 150.379,-147.999 150.379,-142.041 151.75,-140.671 151.75,-55.976 146.574,-50.8 K114.7@144.015,-50.8
  Signal Layer 2 w0.3: K106.7@129.157,-50.8 129.157,-49.512 130.173,-48.496 139.037,-48.496 141.349,-50.808 144.015,-50.808 K114.7@144.015,-50.8
  Bottom Layer w0.3: L1.55@113.126,-192.681 113.126,-191.516 112.025,-190.416 112.025,-186.945 112.025,-185.741 v1(113.126,-184.64)
Y110: K105.7 K113.7 L1.56 | length 187.7
  Mid w0.3: L1.56@113.156,-189.99 113.156,-188.926 114.226,-187.856 114.226,-186.801 112.376,-184.951 112.376,-183.919 117.6,-178.695 117.6,-177.188 121.915,-172.872 123.075,-172.872 123.999,-171.949 125.552,-171.949 125.903,-171.597 125.903,-171.474 130.369,-167.009 130.369,-166.977 142.844,-154.502 142.844,-151.995 143.464,-151.375 146.155,-151.375 149.779,-147.75 149.779,-141.793 151.15,-140.423 151.15,-58.424 144.975,-52.25 143.424,-52.25 141.974,-50.8 K113.7@136.531,-50.8
  Bottom Layer w0.3: K105.7@122.235,-50.8 122.235,-49.474 123.188,-48.522 135.888,-48.522 136.531,-49.165 K113.7@136.531,-50.8
Y112: K112.7 K120.7 L1.57 | length 219.3
  Signal Layer 2 w0.3: K120.7@105.344,-27.276 105.344,-29.084 113.778,-37.518 113.778,-38.325 114.806,-39.353 114.806,-40.783 114.632,-40.957 114.632,-54.898 114.482,-55.048 114.482,-76.489 114.631,-76.639 114.631,-77.758 114.482,-77.908 114.482,-95.487 ; L1.57@113.126,-187.401 113.979,-187.401 121.023,-180.356 121.023,-180.128 121.644,-179.508 123.257,-179.508 125.287,-177.477 125.412,-177.352 128.605,-177.352 129.788,-177.352 130.409,-176.732 130.409,-175.901 133.437,-172.872 137.37,-172.872 141.604,-168.639 141.604,-164.356 136.582,-159.335 135.944,-159.335 135.319,-158.709 135.319,-156.057 ; 114.507,-95.314 114.507,-98.915 114.806,-99.215 114.806,-119.87 118.028,-123.092 118.159,-123.092 118.95,-123.883 118.95,-124.015 121.023,-126.088 121.023,-128.841 ; 121.109,-128.755 121.023,-128.841 ; 121.023,-128.841 121.023,-143.494 124.047,-146.518 124.047,-147.4 126.822,-150.175 130.285,-150.175 131.609,-151.498 131.609,-152.347 ; 131.609,-152.347 135.319,-156.057 ; 131.609,-152.347 135.319,-156.057
  Bottom Layer w0.3: K112.7@90.422,-27.276 90.422,-27.262 90.422,-26.788 92.107,-25.103 95.781,-25.103 104.303,-25.103 105.344,-26.144 K120.7@105.344,-27.276
Y114: K111.7 K119.7 L1.58 | length 227.9
  Signal Layer 2 w0.3: K111.7@82.817,-27.276 82.817,-26.144 84.494,-24.468 96.518,-24.468 98.183,-26.134 K119.7@98.183,-27.276 96.971,-28.488 96.971,-38.226 99.787,-41.041 105.97,-41.041 106.596,-41.667 106.596,-43.347 114.032,-50.783 114.032,-54.649 113.882,-54.799 113.882,-76.738 114.031,-76.888 114.031,-77.509 113.882,-77.659 113.882,-119.962 117.612,-123.692 117.91,-123.692 118.35,-124.132 118.35,-124.263 120.423,-126.337 120.423,-143.743 123.447,-146.767 123.447,-147.649 126.573,-150.775 127.173,-151.375 127.757,-151.375 128.357,-150.775 130.036,-150.775 131.009,-151.747 131.009,-152.595 134.719,-156.305 134.719,-158.958 135.696,-159.935 136.333,-159.935 141.004,-164.605 141.004,-166.705 137.743,-169.966 137.743,-171.652 137.122,-172.272 133.189,-172.272 131.389,-174.072 126.995,-174.072 124.687,-176.38 124.687,-177.229 123.008,-178.908 121.395,-178.908 115.984,-184.319 115.984,-184.322 ; 115.984,-184.322 v1(115.666,-184.64) 115.89,-184.64 115.984,-184.547 115.984,-184.322
  Bottom Layer w0.3: L1.58@115.666,-192.681 114.565,-191.58 114.565,-190.416 114.565,-186.945 115.666,-185.845 v1(115.666,-184.64)
Y116: K110.7 K118.7 L1.59 | length 213.9
  Mid w0.3: L1.59@115.696,-189.99 117.016,-188.671 117.016,-184.208 120.423,-180.801 120.423,-179.88 121.395,-178.908 123.11,-178.908 123.651,-179.449 124.148,-179.449 127.385,-176.212 127.385,-174.825 128.357,-173.853 129.744,-173.853 130.124,-173.472 130.245,-173.472 131.569,-172.149 131.569,-172.028 135.804,-167.792 137.37,-167.792 138.343,-166.82 138.343,-165.254 143.662,-159.935 144.895,-159.935 147.38,-157.451 147.38,-154.018 149.62,-151.777 149.62,-150.455 151.579,-148.496 151.579,-142.538 152.95,-141.168 152.95,-139.639 157.478,-135.11 157.478,-32.601 151.801,-26.924 K118.7@144.016,-26.924
  Signal Layer 2 w0.3: K110.7@129.157,-26.924 129.157,-28.684 129.919,-29.446 140.282,-29.446 141.882,-27.846 144.016,-27.846 K118.7@144.016,-26.924
Y118: K109.7 K117.7 L1.60 | length 203.9
  Mid w0.3: L1.60@115.666,-187.401 115.666,-185.701 116.416,-184.951 116.416,-183.039 121.147,-178.308 123.358,-178.308 123.899,-178.849 123.899,-177.461 128.108,-173.253 129.496,-173.253 129.876,-172.872 129.996,-172.872 130.969,-171.9 130.969,-171.78 135.747,-167.001 135.939,-167.192 137.122,-167.192 137.743,-166.572 137.743,-165.005 143.413,-159.335 144.647,-159.335 146.467,-157.514 146.467,-154.081 149.02,-151.528 149.02,-150.207 150.979,-148.247 150.979,-142.29 152.35,-140.92 152.35,-42.743 K117.7@136.531,-26.924
  Signal Layer 2 w0.3: K109.7@122.235,-26.924 122.235,-25.548 122.553,-25.23 133.525,-25.23 134.973,-26.678 136.531,-26.678 K117.7@136.531,-26.924
Y120: K124.7 K132.7 L1.61 | length 261.8
  Mid w0.3: v1(118.206,-184.64) 121.023,-181.823 121.023,-180.128 121.644,-179.508 122.861,-179.508 123.402,-180.049 124.397,-180.049 127.985,-176.461 127.985,-175.073 128.605,-174.453 129.993,-174.453 130.373,-174.072 130.493,-174.072 132.169,-172.397 132.169,-172.277 136.053,-168.392 137.619,-168.392 138.943,-167.069 138.943,-165.503 143.91,-160.535 145.144,-160.535 147.98,-157.699 147.98,-154.565 150.22,-152.325 150.22,-150.704 152.179,-148.744 152.179,-142.787 154.352,-140.615 155.529,-140.615 157.478,-138.666 157.478,-135.959 158.078,-135.359 158.078,-32.352 157.726,-32.001 157.726,-9.208 154.767,-6.248 154.352,-6.248 152.912,-4.808 145.447,-4.808 144.607,-5.648 128.565,-5.648 127.115,-4.198 K132.7@122.235,-4.198
  Bottom Layer w0.3: K124.7@105.344,-4.198 105.344,-4.173 122.235,-4.173 K132.7@122.235,-4.198 ; L1.61@118.206,-192.681 118.206,-191.516 117.105,-190.416 117.105,-185.741 v1(118.206,-184.64)
Y122: K123.7 K131.7 L1.62 | length 278.1
  Signal Layer 2 w0.3: 81.645,-14.243 81.645,-13.529 ; K123.7@90.422,-4.173 K123.7@90.422,-4.198 90.422,-5.466 82.98,-12.908 82.266,-12.908 81.645,-13.529 ; K131.7@98.183,-4.198 K131.7@98.183,-4.173 ; 115.822,-76.132 116.098,-76.408 ; L1.62@118.236,-189.99 119.744,-191.498 122.68,-191.498 123.088,-191.091 123.771,-191.091 124.458,-190.404 124.458,-188.959 ; 81.645,-13.529 81.645,-15.188 82.266,-15.808 104.664,-15.808 116.098,-27.242 116.098,-76.408 ; 116.098,-117.054 121.661,-122.617 ; 116.098,-117.054 121.661,-122.617 ; 116.098,-117.054 116.098,-76.408 ; 121.661,-122.617 123.075,-122.617 124.047,-123.589 ; 124,-188.501 122.83,-188.501 122.185,-187.856 122.185,-187.141 119.996,-184.951 119.996,-184.33 120.701,-183.624 122.392,-183.624 122.726,-183.29 124.782,-183.29 128.565,-179.508 130.735,-179.508 136.17,-174.072 137.867,-174.072 142.804,-169.136 142.804,-164.913 143.254,-164.463 143.254,-161.678 132.809,-151.233 132.809,-151.001 130.782,-148.975 130.55,-148.975 130.369,-148.793 130.369,-146.915 127.506,-144.052 127.506,-129.014 ; 124,-188.501 124.458,-188.958 ; 124,-188.501 124.458,-188.959 ; 124.047,-123.589 124.047,-125.556 127.506,-129.014 ; 124.047,-123.589 127.506,-127.048 127.506,-129.014
  Bottom Layer w0.3: K123.7@90.422,-4.198 K131.7@98.183,-4.198
Y124: K122.7 K130.7 L1.63 | length 232.8
  Mid w0.3: L1.63@118.206,-187.401 118.206,-186.12 121.635,-182.69 122.837,-182.69 128.175,-177.352 129.788,-177.352 130.409,-176.732 130.409,-174.903 130.639,-174.672 130.742,-174.672 132.769,-172.646 132.769,-172.543 135.939,-169.373 137.487,-169.373 139.543,-167.317 139.543,-165.751 144.159,-161.135 145.879,-161.135 148.58,-158.434 148.58,-154.814 150.82,-152.573 150.82,-150.952 152.779,-148.993 152.779,-143.035 154.6,-141.215 155.778,-141.215 157.472,-139.52 157.98,-139.52 158.326,-139.174 158.326,-135.959 158.678,-135.608 158.678,-32.104 158.326,-31.752 158.326,-8.959 155.016,-5.648 154.6,-5.648 153.15,-4.198 146.057,-4.198 144.607,-2.749 143.424,-2.749 141.974,-4.198 K130.7@136.531,-4.198
  Signal Layer 2 w0.3: K122.7@129.157,-4.198 129.157,-4.453 136.531,-4.453 K130.7@136.531,-4.198
Y126: K121.7 K129.7 L1.64 | length 380.3
  Signal Layer 2 w0.3: v1(120.746,-184.64) 121.162,-184.224 122.641,-184.224 122.975,-183.89 128.31,-183.89 130.409,-181.792 ; K129.7@144.015,-4.198 144.015,-2.98 144.778,-2.218 156.411,-2.218 160.932,-6.739 180.648,-6.739 180.789,-6.598 181.41,-6.598 181.551,-6.739 188.962,-6.739 ; 188.974,-6.739 219.959,-6.739 220.099,-6.598 ; K121.7@220.873,-4.198 220.873,-5.824 220.099,-6.598 ; 130.409,-181.792 130.409,-181.592 134.294,-177.708 134.493,-177.708 ; 130.409,-181.792 134.493,-177.708 ; 134.493,-177.708 138.503,-177.708 143.254,-172.956 145.961,-172.956 146.865,-172.053 ; 146.865,-172.053 154.38,-172.053 154.6,-172.272 155.783,-172.272 156.403,-171.652 156.403,-168.951 160.927,-164.427 160.927,-164.416 ; 146.865,-172.053 149.967,-168.951 156.392,-168.951 160.927,-164.416 ; 160.927,-164.416 167.13,-158.213 167.13,-129.944 170.091,-126.982 172.935,-126.982 ; 172.935,-126.982 176.423,-123.495 ; 172.935,-126.982 176.423,-123.494 ; 176.423,-123.494 176.423,-123.341 178.727,-121.037 179.426,-121.037 182.636,-117.828 182.636,-107.718 183.195,-107.159 183.696,-107.159 184.136,-106.719 184.136,-105.523 183.608,-104.995 183.608,-83.524 184.034,-83.097 184.034,-63.85 ; 184.034,-63.85 186.779,-61.105 186.779,-58.61 ; 184.034,-63.85 184.034,-61.355 186.779,-58.61 ; 186.779,-58.61 188.962,-56.427 188.962,-55.806 187.97,-54.814 187.97,-14.328 188.962,-13.336 188.962,-6.739 ; 188.962,-6.739 188.962,-6.61 188.974,-6.598 220.099,-6.598
  Bottom Layer w0.3: L1.64@120.746,-192.681 119.645,-191.58 119.645,-186.945 120.746,-185.845 v1(120.746,-184.64)
Y128: K128.7 K136.7 L1.65 | length 233.5
  Mid w0.3: L1.65@120.776,-189.99 121.846,-188.92 121.846,-187.149 122.536,-186.459 122.536,-184.33 122.975,-183.89 123.334,-183.89 128.672,-178.552 130.285,-178.552 131.609,-177.229 131.609,-177.126 135.482,-173.253 137.878,-173.253 140.968,-170.162 140.968,-169.233 142.804,-167.397 142.804,-164.913 144.267,-163.449 144.267,-162.972 144.904,-162.335 146.376,-162.335 149.779,-158.931 149.779,-155.311 152.02,-153.07 152.02,-151.449 153.979,-149.49 153.979,-146.915 157.818,-143.076 158.234,-143.076 160.927,-140.384 160.927,-31.03 162.25,-29.706 162.95,-29.706 172.277,-20.379 172.277,-18.915 180.647,-10.545 180.647,-8.201 178.835,-6.389 K136.7@178.835,-4.198
  Signal Layer 2 w0.3: K128.7@163.339,-4.198 163.339,-5.564 163.425,-5.651 178.433,-5.651 178.835,-5.248 K136.7@178.835,-4.198
Y130: K127.7 K135.7 L1.66 | length 239.8
  Mid w0.3: L1.66@120.746,-187.401 121.735,-186.411 121.735,-184.282 122.726,-183.29 123.085,-183.29 128.423,-177.952 130.036,-177.952 131.009,-176.98 131.009,-176.878 135.234,-172.653 136.742,-172.653 137.743,-171.652 137.743,-171.609 142.204,-167.148 142.204,-164.665 143.667,-163.201 143.667,-162.723 144.656,-161.735 146.127,-161.735 149.18,-158.682 149.18,-155.062 151.42,-152.822 151.42,-151.201 153.379,-149.241 153.379,-146.667 158.932,-141.115 158.932,-138.423 158.926,-138.418 158.926,-136.208 159.278,-135.856 159.278,-31.855 158.926,-31.504 158.926,-29.648 162.747,-25.826 164.146,-25.826 169.813,-20.159 169.813,-18.584 170.434,-17.964 172.191,-17.964 180.047,-10.108 180.047,-8.449 179.426,-7.829 174.655,-7.829 K135.7@171.025,-4.198
  Bottom Layer w0.3: K127.7@155.192,-4.198 155.192,-3.97 158.163,-0.999 170.771,-0.999 170.601,-1.168 171.025,-1.592 K135.7@171.025,-4.198
Y132: K126.7 K134.7 L1.67 | length 250.6
  Mid w0.3: v1(123.286,-184.64) 123.875,-184.64 127.945,-180.571 127.945,-180.128 128.565,-179.508 131.542,-179.508 134.759,-176.291 134.759,-174.825 135.731,-173.853 138.126,-173.853 142.204,-169.775 142.204,-169.596 145.228,-166.572 145.228,-164.331 150.379,-159.179 150.379,-155.559 152.62,-153.319 152.62,-151.698 154.75,-149.568 154.75,-149.523 155.077,-149.195 155.783,-149.195 156.403,-148.574 156.403,-146.71 161.527,-141.587 161.527,-64.491 161.567,-64.451 161.567,-56.552 161.527,-56.512 161.527,-31.278 162.499,-30.306 165.901,-30.306 181.505,-14.703 189.716,-14.703 190.155,-14.263 190.155,-13.15 192.18,-11.126 192.861,-11.126 197.567,-6.42 K126.7@197.567,-4.198
  Bottom Layer w0.3: L1.67@123.286,-192.681 123.286,-191.516 122.185,-190.416 122.185,-186.945 123.286,-185.845 v1(123.286,-184.64) ; K126.7@197.567,-4.198 197.567,-3.97 199.777,-1.76 211.834,-1.76 212.596,-2.522 ; K134.7@213.063,-4.198 213.063,-2.99 ; 212.596,-2.522 213.063,-2.522 213.063,-2.99 ; 212.596,-2.522 213.063,-2.99
Y134: K125.7 K133.7 L1.68 | length 376.5
  Signal Layer 2 w0.3: L1.68@123.316,-189.99 121.826,-188.501 120.29,-188.501 119.378,-187.588 119.378,-184.046 120.733,-182.69 122.588,-182.69 127.326,-177.952 131.442,-177.952 135.922,-173.472 137.619,-173.472 142.204,-168.888 142.204,-164.665 142.654,-164.215 142.654,-161.926 132.209,-151.481 132.209,-151.25 130.533,-149.575 128.945,-149.575 124.204,-144.833 124.204,-126.561 123.447,-125.805 123.447,-123.838 122.826,-123.217 120.139,-123.217 115.498,-118.575 115.498,-76.657 115.082,-76.241 115.082,-55.296 115.232,-55.146 115.232,-41.205 115.406,-41.031 115.406,-39.104 115.232,-38.93 115.232,-36.775 112.754,-34.297 ; 205.377,-3.178 K133.7@205.377,-4.198 202.177,-0.998 83.071,-0.998 82.817,-1.252 K125.7@82.817,-4.198 81.605,-5.41 81.605,-10.108 81.645,-10.148 81.645,-12.681 81.045,-13.281 81.045,-15.436 82.017,-16.408 82.625,-16.408 82.802,-16.584 104.591,-16.584 112.532,-24.525 112.532,-30.22 ; 112.532,-34.075 112.754,-34.297 ; 112.532,-34.075 112.532,-34.297 112.754,-34.297 ; 112.532,-34.075 112.532,-33.454 ; 112.532,-33.454 112.774,-33.212 112.774,-30.462 112.532,-30.22 ; 112.532,-33.454 112.532,-30.22
Y136: K140.7 K148.7 L1.69 | length 208.8
  Mid w0.3: L1.69@123.286,-187.401 124.27,-187.401 127.016,-184.655 127.016,-184.081 128.084,-183.013 130.036,-183.013 133.519,-179.53 133.519,-179.383 135.549,-177.352 138.523,-177.352 143.603,-172.272 144.607,-172.272 146.428,-170.452 146.428,-164.828 151.579,-159.676 151.579,-156.056 154.02,-153.616 154.02,-151.995 154.64,-151.375 155.3,-151.375 157.603,-149.071 157.603,-148.893 162.002,-144.495 163.55,-144.495 164.551,-143.494 164.551,-138.082 165.013,-137.62 165.013,-121.85 166.213,-120.65 166.213,-117.267 166.298,-117.182 166.298,-115.114 166.813,-114.599 166.813,-46.527 169.813,-43.527 169.813,-41.662 170.434,-41.041 172.191,-41.041 180.047,-33.186 180.047,-31.527 178.835,-30.315 K148.7@178.835,-27.276
  Bottom Layer w0.3: K140.7@163.339,-27.276 163.339,-27.287 168.654,-27.287 171.194,-24.747 177.438,-24.747 178.835,-26.144 K148.7@178.835,-27.276
Y138: K139.7 K147.7 L1.70 | length 213.3
  Mid w0.3: v1(125.826,-184.64) 125.826,-184.423 127.836,-182.413 129.788,-182.413 130.409,-181.792 130.409,-181.644 135.359,-176.694 135.359,-175.073 135.979,-174.453 140.286,-174.453 142.804,-171.935 142.804,-169.844 145.828,-166.82 145.828,-164.58 150.979,-159.428 150.979,-155.808 153.22,-153.567 153.22,-151.946 155.372,-149.795 156.031,-149.795 157.003,-148.823 157.003,-148.117 162.127,-142.994 162.127,-64.74 162.167,-64.7 162.167,-56.303 162.127,-56.263 162.127,-31.527 162.747,-30.906 167.395,-30.906 K147.7@171.025,-27.276
  Bottom Layer w0.3: L1.70@125.826,-192.681 125.826,-191.516 124.725,-190.416 124.725,-186.945 124.725,-185.741 v1(125.826,-184.64) ; K139.7@155.191,-27.276 155.191,-28.684 155.547,-29.04 168.679,-29.04 ; K147.7@171.025,-27.276 171.025,-28.583 ; 168.679,-29.04 169.136,-28.583 171.025,-28.583 ; 168.679,-29.04 170.568,-29.04 171.025,-28.583
Y140: K138.7 K146.7 L1.71 | length 228.6
  Signal Layer 2 w0.3: L1.71@125.856,-189.99 125.856,-188.926 126.926,-187.856 126.926,-187.285 127.91,-186.3 129.488,-186.3 130.099,-185.69 130.099,-184.381 135.572,-178.908 139,-178.908 143.455,-174.453 144.744,-174.453 144.956,-174.664 145.95,-174.664 146.55,-174.064 153.331,-174.064 153.923,-173.472 156.28,-173.472 162.127,-167.626 162.127,-164.913 163.389,-163.65 167.378,-163.65 168.902,-162.126 169.41,-162.126 169.813,-161.724 169.813,-133.973 169.853,-133.933 169.853,-130.576 169.853,-128.918 170.588,-128.182 173.432,-128.182 177.623,-123.992 177.623,-123.838 179.224,-122.237 179.923,-122.237 183.986,-118.175 183.986,-109.1 185.336,-107.75 185.336,-102.907 184.808,-102.379 184.808,-84.021 185.234,-83.594 185.234,-64.347 187.979,-61.602 187.979,-59.107 196.355,-50.731 196.355,-49.525 204.165,-41.715 204.165,-31.527 205.377,-30.315 K138.7@205.377,-27.276
  Bottom Layer w0.3: K138.7@205.377,-27.276 205.377,-28.684 205.732,-29.04 215.72,-29.04 217.498,-27.262 220.873,-27.262 K146.7@220.873,-27.276